# EAGLE board WearablesPlatineRFDuino-2 (EAGLE 7.6.0)
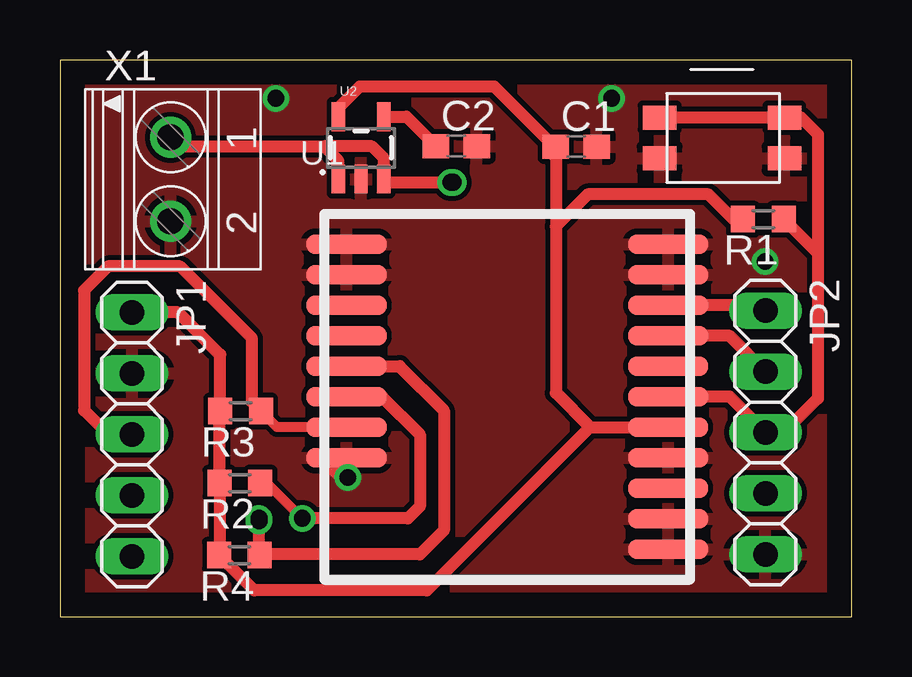
[diagram p0: board, top side]
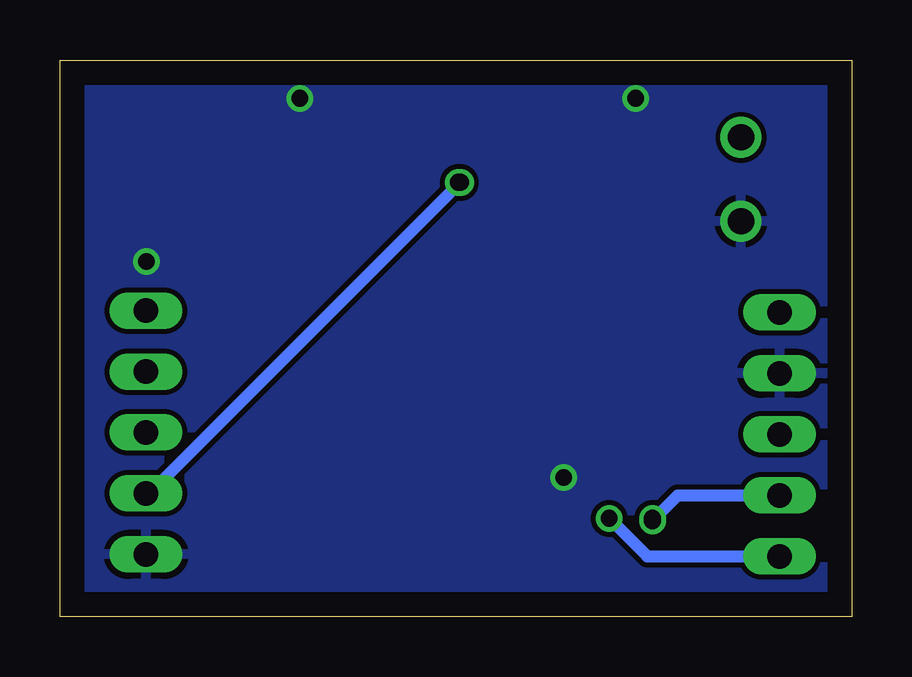
[diagram p1: board, bottom side, seen from below]

Size 33 x 23.2 mm. Coordinates in mm from the lower left corner, seen from the top.
Outline: 0,0 33,0 33,23.2 0,23.2 0,0
Copper layers (1*16): Top 0.035mm / dielectric 1.5mm / Bottom 0.035mm
Design rules "default *": minimum track width 10mil, minimum drill 24mil, track to track 8mil, track to pad 8mil, pad to pad 8mil, via to via 8mil, smd to smd 8mil, copper to edge 40mil, drill to drill 8mil, minimum pad ring 10mil, minimum via ring 8mil, stop-mask expansion 4mil, vias tented up to drill 0mil, thermal gap 10mil

## Footprints (pad centres in the part's own frame; a part is rotated, then mirrored left to right if it is on the bottom)
C0603 = smd 1.1 x 1: 1 -0.85,0; 2 0.85,0
1X05 = drill 1.016 long: 1 -5.08,0; 2 -2.54,0; 3 0,0; 4 2.54,0; 5 5.08,0
R0603 = smd 1 x 1.1: 1 -0.85,0; 2 0.85,0
RFD22301 = smd 3.353 x 0.813: 1 -6.706,7.62; 2 -6.706,6.35; 3 -6.706,5.08; 4 -6.706,3.81; 5 -6.706,2.54; 6 -6.706,1.27; 7 -6.706,0; 8 -6.706,-1.27; 9 6.706,-5.08; 10 6.706,-3.81; 11 6.706,-2.54; 12 6.706,-1.27; 13 6.706,0; 14 6.706,1.27; 15 6.706,2.54; 16 6.706,3.81; 17 6.706,5.08; 18 6.706,6.35; 19 6.706,7.62
SOT23-5 = smd 0.55 x 1.2: 1 -0.95,-1.3; 2 0,-1.3; 3 0.95,-1.3; 4 0.95,1.3; 5 -0.95,1.3
EVQ-PUK02K = smd 1.4 x 1: 1 5,2.5; 2 5,0.8; 3 -0.2,2.5; 4 -0.2,0.8
1751248 = drill 1.1 pad 1.7: 1 -1.75,-0.1; 2 1.75,-0.1

## Placement (x,y rotation side)
C1  2.2µ  [C0603]  21.52,19.59 0 top
C2  470p  [C0603]  16.52,19.61 0 top
JP1  [1X05]  3,7.6 270 top
JP2  [1X05]  29.41,7.68 270 top
R1  8k  [R0603]  29.32,16.57 180 top
R2  8k  [R0603]  7.5,5.57 180 top
R3  8k  [R0603]  7.53,8.57 180 top
R4  22k  [R0603]  7.48,2.57 180 top
U1  RFD22301  [RFD22301]  18.65,7.9 0 top
U2  3.3V/150mA  [SOT23-5]  12.55,19.54 0 top
U$1  TACTILE_SWITCH  [EVQ-PUK02K]  30,21.6 180 top
X1  1751248  [1751248]  4.71,18.23 270 top

## Library data of the parts
C1 C2 = rcl
JP1 JP2 = pinhead
R1-R4 = resistor
U1 = RF_Digital_RFD22301_Eagle_Schematic_PCB_Library
U2 = SparkFun-IC-Power; PROD_ID: VREG-00822
U$1 = jnode; DIGIKEY: http://search.digikey.com/scripts/DkSearch/dksus.dll?Detail&name=P10852SCT-ND
X1 = con-phoenix-350; OC_FARNELL: unknown; OC_NEWARK: unknown

## Nets
3V3: C1.1 JP1.1 R1.2 R2.2 R3.2 R4.2 U1.13 U2.5
GND: C1.2 C2.2 JP1.2 JP2.5 U1.1 U1.2 U1.8 U1.9 U1.10 U1.12 U1.18 U1.19 U2.2 U$1.1 U$1.3 X1.2
GPIO0: JP2.2 U1.16
GPIO1: JP2.1 U1.17
INT: JP1.4 R4.1 U1.5
N$5: C2.1 U2.4
RESET: JP2.3 R1.1 U1.14 U$1.2 U$1.4
SCL: JP1.5 R2.1 U1.6
SDA: JP1.3 R3.1 U1.7
VIN: JP2.4 U2.1 U2.3 X1.1

## Tracks (layer width: path | path; a pad name or v marks a point on that pad's centre or on a via)
3V3
  Top 0.406: U2.5 11.6,21.2 | 6.65,2.59 R4.2 | 6.65,8.54 R3.2 | 28.07,16.57 R1.2
  Top 0.5: C1.1 20.67,19.53 | 20.67,16.27 20.67,19.1 20.67,19.53 | 20.67,16.27 20.67,9.33 22.1,7.9 | 22.1,7.9 U1.13 | JP1.1 4.92,12.68 6.68,10.92 R3.2 | 22.1,7.9 15.3,1.1 8.1,1.1 R4.2 | 6.65,2.59 R2.2 6.65,8.54 | 20.67,16.27 22,17.6 27.04,17.6 28.07,16.57 | 11.6,21.2 12.5,22.1 18.1,22.1 20.67,19.53
GND  (via drill 0.7 pad 1.02)
  Top 0.406: 11,6.6 11.03,6.63 U1.8
  Top 0.61: 11,6.6 11.8,5.8 v12,5.8
  other vias: 23,21.6 9,21.6 29.4,14.8
  pour Top: -3,23.6 37,23.6 37,-0.4 -3,-0.4
  pour Bottom: -2,24.6 36,24.6 36,-1.4 -2,-1.4
GPIO0
  Top 0.5: JP2.2 27.92,11.71 U1.16
GPIO1
  Top 0.5: JP2.1 29.19,12.98 U1.17
INT  (via drill 0.7 pad 1.02)
  Top 0.406: 8.36,2.6 R4.1 8.3,2.6
  Top 0.5: U1.5 14.16,10.44 16,8.6 16,3.6 15,2.6 8.36,2.6 | 8.3,2.6 v8.3,4
  Bottom 0.5: JP1.4 7.24,5.06 v8.3,4
N$1  (via drill 0.7 pad 1.02)
  other vias: 16.4,18.1
N$2  (via drill 0.7 pad 1.02)
  other vias: 8.3,4.1
N$5
  Top 0.5: U2.4 14.44,20.84 C2.1
RESET
  Top 0.5: U$1.2 U$1.4 30.9,20.8 31.6,20.1 31.6,15.14 | U1.14 27.92,9.17 JP2.3 30.18,7.68 31.6,9.1 31.6,14.6 31.6,15.14 | R1.1 31.6,15.14
SCL  (via drill 0.7 pad 1.02)
  Top 0.406: U1.6 13.43,9.17 | 8.38,5.6 R2.1 8.63,5.57 v10.1,4.1
  Top 0.5: 13.43,9.17 15,7.6 15,4.6 14.5,4.1 v10.1,4.1
  Bottom 0.5: JP1.5 8.52,2.52 v10.1,4.1
SDA
  Top 0.406: U1.7 9.05,7.9 R3.1 8,8.95
  Top 0.5: 8,8.95 8,11.6 5,14.6 2,14.6 1,13.6 1,8.6 2,7.6 JP1.3
VIN  (via drill 0.7 pad 1.02)
  Top 0.406: X1.1 5,19.6 | U2.3 13.64,18.1
  Top 0.5: 5,19.6 11,19.6 | 11,19.6 11.6,19 U2.1 | U2.3 13.5,19.1 13,19.6 11,19.6 | 13.64,18.1 v16.3,18.1
  Bottom 0.5: v16.3,18.1 29.26,5.14 JP2.4